# Altium PCB PCB.PcbDoc
Units mm, origin at the board's own origin, x right, y up, seen from the top; angles counter-clockwise.
Board outline 152.4 x 101.6 mm, 2 copper layers (Top Layer, Bottom Layer); 14 components, 24 nets, 96 pads, 0 vias.
Unrouted connection lines stored in the file: 43.
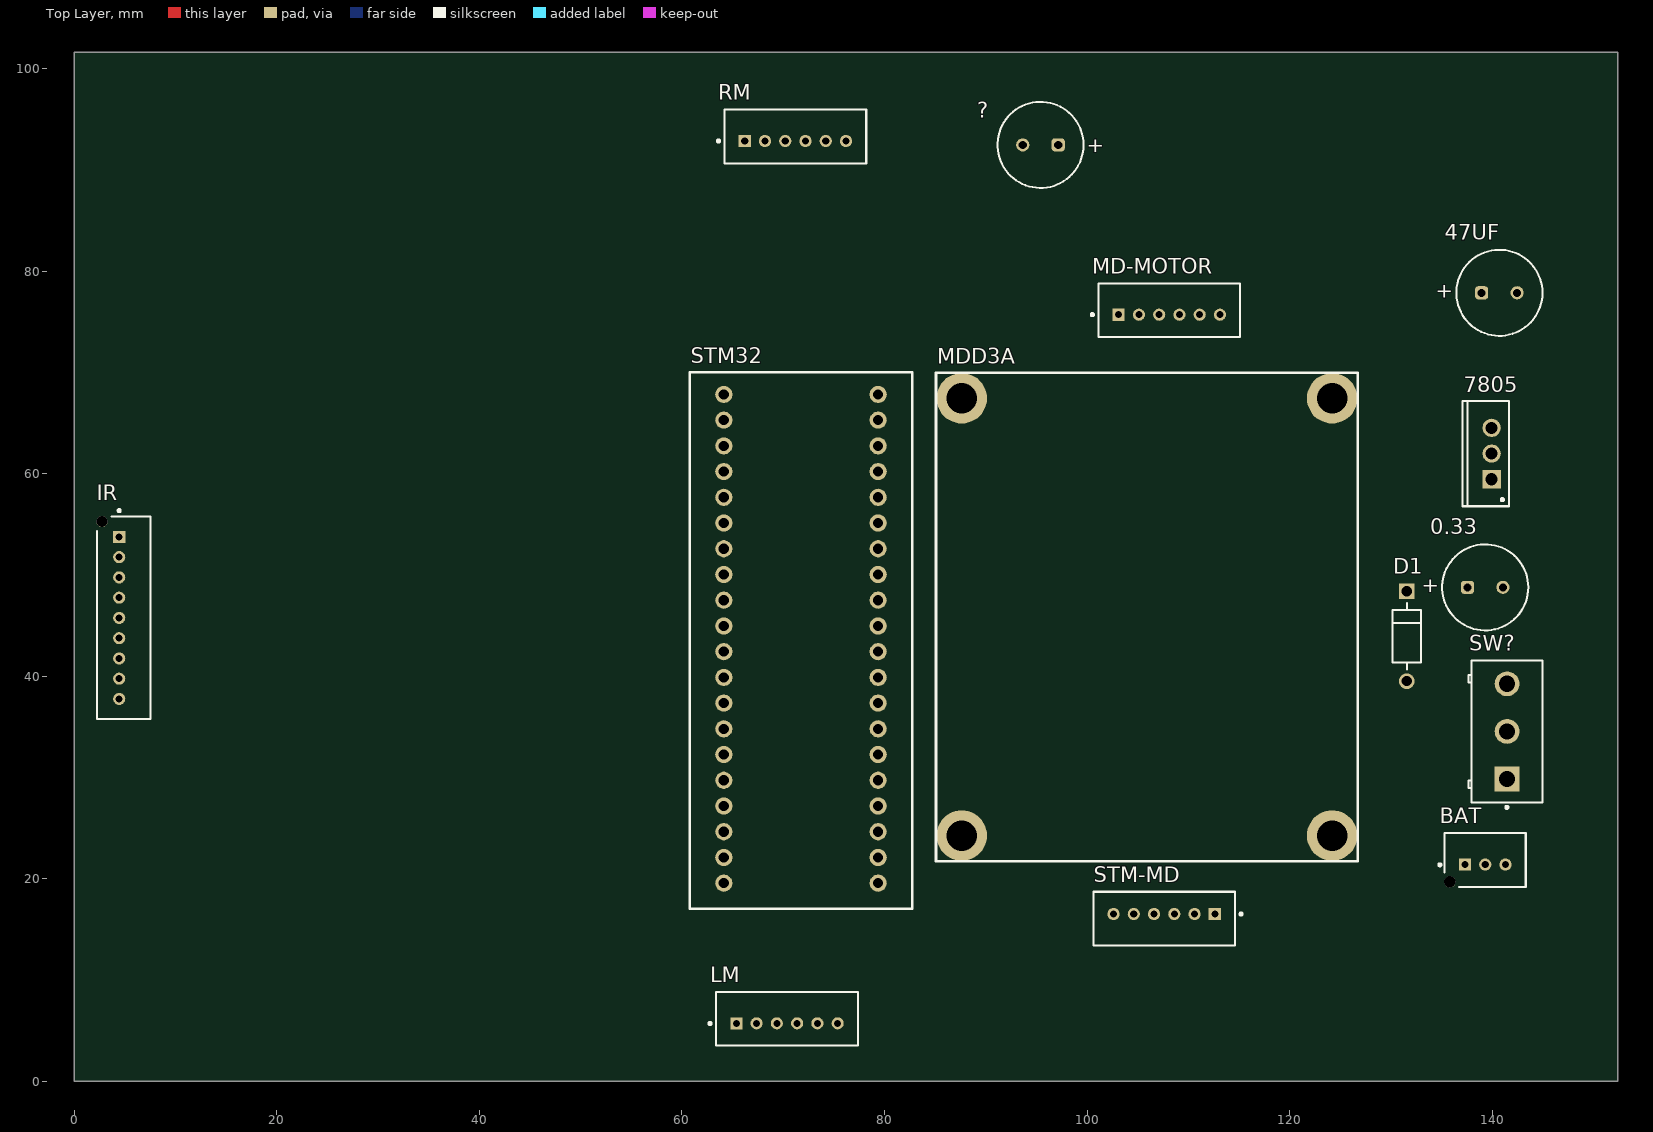
[diagram p0: Top Layer view]
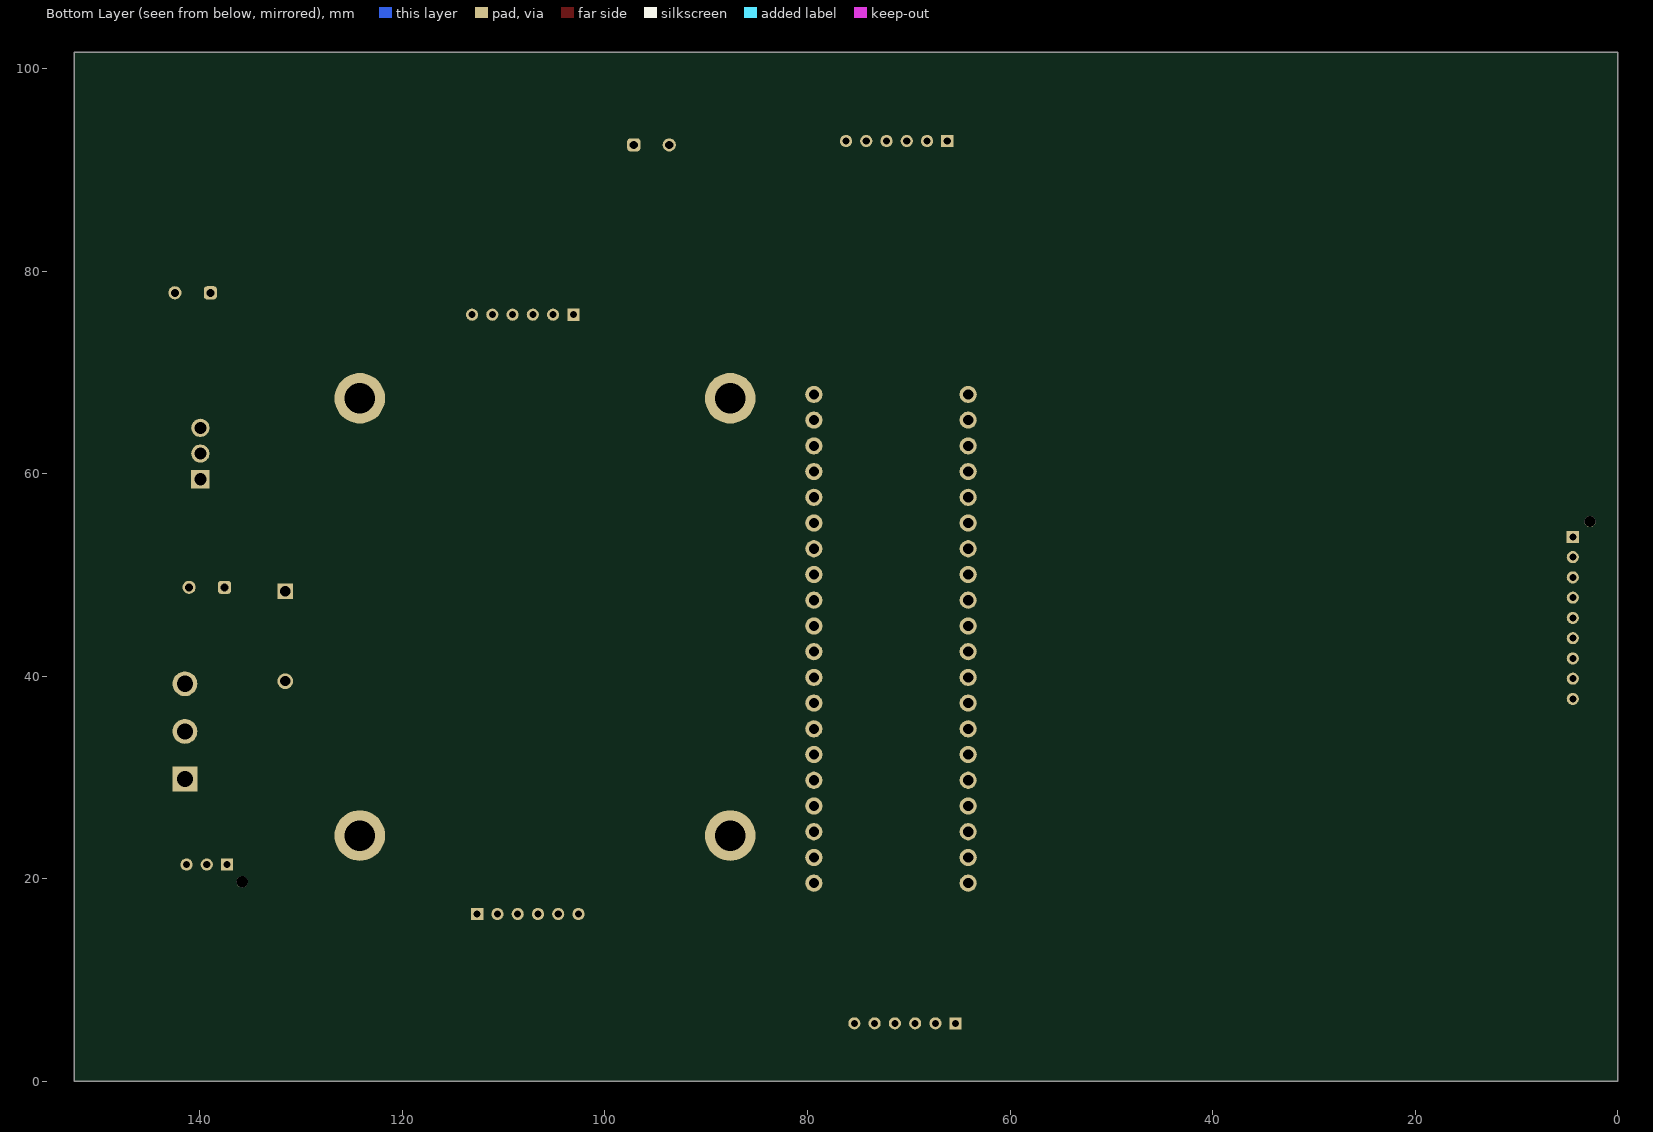
[diagram p1: Bottom Layer view, seen from below]

## Layer stack, top to bottom
Top Solder: solder mask 0.0102, Solder Resist, Dk 3.5
Top Layer: signal copper 0.0356
Dielectric 1: dielectric 0.32, FR-4, Dk 4.8
Bottom Layer: signal copper 0.0356
Bottom Solder: solder mask 0.0102, Solder Resist, Dk 3.5

## Board outline
0,0 152.4,0 152.4,101.6 0,101.6

## Design rules (kind name [scope] priority, off if disabled: settings)
Clearance [All] p1: gap=0.254 ignorepadtopadclearanceinfootprint=FALSE
PolygonConnect [All] p1: connectstyle=Relief reliefconductorwidth=0.254 reliefentries=4 polygonreliefangle="90 Angle" airgapwidth=0.254
RoutingVias [All] p1: holewidth=0.711 width=1.27 viastyle="Through Hole" minholewidth=0.711 minwidth=1.27 maxholewidth=0.711 maxwidth=1.27
SolderMaskExpansion [All] p1: expansion=0 istentingtop=FALSE
SupplyNets "Schematic Supply Nets_1" [InNet('+5')] p1: voltage=0.000
SupplyNets "Schematic Supply Nets" [InNet('GND')] p2: voltage=0.000
Width [All] p1: maxlimit=0.254 minlimit=0.254 preferedwidth=0.254
30 further rules are at their usual default settings.

## Components (designator, comment, footprint, x,y, rotation, side; value= is the part's Value field where it differs from the comment)
0.33 "860160274015" WCAP-ATLL_D8H11.5 139.319,48.768 r180 top
47UF "860160274015" WCAP-ATLL_D8H11.5 140.716,77.851 r180 top
7805 "L7805CP" TO220FP 139.954,61.976 r90 top
? "860160274015" WCAP-ATLL_D8H11.5 95.405,92.456 r0 top
BAT "B03B-PASK-1(LF)(SN)" FP-B03B-PASK-1_LF_SN-MFG 139.319,21.844 r180 top
D1 "1N4007" FP-1N4007-MFG 131.572,43.942 r270 top value=15pF
IR "B09B-PASK-1(LF)(SN)" FP-B09B-PASK-1_LF_SN-MFG 4.884,45.752 r90 top
LM "B06B-PASK(LF)(SN)" FP-B06B-PASK_LF_SN-MFG 70.374,6.165 r180 top
MD-MOTOR "B06B-PASK(LF)(SN)" FP-B06B-PASK_LF_SN-MFG 108.124,76.142 r180 top
MDD3A "MDD3A_MODULE" MDD3A_MODULE 126.75,21.717 r90 top (schematic designator *)
RM "B06B-PASK(LF)(SN)" FP-B06B-PASK_LF_SN-MFG 71.199,93.287 r180 top
STM32 "STM32_BLUEPILL" STM32_Bluepill 82.755,17.018 r90 top
STM-MD "B06B-PASK(LF)(SN)" FP-B06B-PASK_LF_SN-MFG 107.617,16.06 r0 top
SW? "CS12ANW03" FP-CS12ANW03-MFG 141.478,34.543 r90 top

## Footprints (in the part's own frame and the unit in brackets; to place one, negate y for a bottom-side part, rotate by r counter-clockwise, add the part's x,y. Pads: shape width x height; smd on the part's side, far side on the other; paste and mask are expansions set on the pad)
FP-1N4007-MFG [mm]
  rect 1.55x1.55 hole 1 paste-2539.97 mask+0: 1(-4.44,0)
  round 1.55 hole 1 paste-2539.97 mask+0: 2(4.44,0)
  silkscreen extent -3.26,-1.4 3.26,1.4, body extent -5.32,-1.5 5.32,1.5, height 0.25
FP-B03B-PASK-1_LF_SN-MFG [mm]
  rect 1.2x1.2 hole 0.7 paste-2539.97 mask+0: 1(2,0.45)
  round 1.2 hole 0.7 paste-2539.97 mask+0: 2(0,0.45) 3(-2,0.45)
  round 1.1 hole 1.1 unplated paste-2539.97 mask+0: ""(3.5,2.15)
  silkscreen extent -4,-2.65 4.6,2.65, body extent -4.1,-2.75 4.15,2.8, height 0.25
FP-B06B-PASK_LF_SN-MFG [mm]
  rect 1.2x1.2 hole 0.7 paste-2539.97 mask+0: 1(5,0.45)
  round 1.2 hole 0.7 paste-2539.97 mask+0: 2(3,0.45) 3(1,0.45) 4(-1,0.45) 5(-3,0.45) 6(-5,0.45)
  silkscreen extent -7,-2.65 7.72,2.65, body extent -7.1,-2.75 7.1,2.75, height 0.25
FP-B09B-PASK-1_LF_SN-MFG [mm]
  rect 1.2x1.2 hole 0.7 paste-2539.97 mask+0: 1(8,0.45)
  round 1.2 hole 0.7 paste-2539.97 mask+0: 2(6,0.45) 3(4,0.45) 4(2,0.45) 5(0,0.45) 6(-2,0.45) 7(-4,0.45) 8(-6,0.45) 9(-8,0.45)
  round 1.1 hole 1.1 unplated paste-2539.97 mask+0: ""(9.5,2.15)
  silkscreen extent -10,-2.65 10.72,2.65, body extent -10.1,-2.75 10.15,2.8, height 0.25
FP-CS12ANW03-MFG [mm]
  rect 2.45x2.45 hole 1.6 paste-2539.97 mask+0: 1(-4.7,0)
  round 2.45 hole 1.6 paste-2539.97 mask+0: 2(0,0) 3(4.7,0)
  silkscreen extent -7.62,-3.5 7,3.8, body extent -7.1,-3.6 7.1,3.91, height 0.25
MDD3A_MODULE [mm]
  round 5 hole 3: MH1(2.54,39.12) MH2(45.72,39.12) MH3(2.54,2.54) MH4(45.72,2.54)
  silkscreen extent 0,0 48.26,41.66
STM32_Bluepill [mm]
  round 1.7 hole 1: 1(2.54,18.62) 2(5.08,18.62) 3(7.62,18.62) 4(10.16,18.62) 5(12.7,18.62) 6(15.24,18.62) 7(17.78,18.62) 8(20.32,18.62) 9(22.86,18.62) 10(25.4,18.62) 11(27.94,18.62) 12(30.48,18.62) 13(33.02,18.62) 14(35.56,18.62) 15(38.1,18.62) 16(40.64,18.62) 17(43.18,18.62) 18(45.72,18.62) 19(48.26,18.62) 20(50.8,18.62) 21(2.54,3.38) 22(5.08,3.38) 23(7.62,3.38) 24(10.16,3.38) 25(12.7,3.38) 26(15.24,3.38) 27(17.78,3.38) 28(20.32,3.38) 29(22.86,3.38) 30(25.4,3.38) 31(27.94,3.38) 32(30.48,3.38) 33(33.02,3.38) 34(35.56,3.38) 35(38.1,3.38) 36(40.64,3.38) 37(43.18,3.38) 38(45.72,3.38) 39(48.26,3.38) 40(50.8,3.38)
  silkscreen extent 0,0 53,22
TO220FP [mm] "TO, Thru-Hole, Vertical, Heatsink Mounted; 3 In-Line Leads; Pitch 2.54 mm"
  rect 1.8x1.8 hole 1.2: 1(-2.54,0)
  round 1.8 hole 1.2: 2(0,0) 3(2.54,0)
  silkscreen extent -5.2,-1.7 5.2,2.9, body extent -5.25,-1.75 5.25,2.95, height 20
WCAP-ATLL_D8H11.5 [mm] "Aluminum Electrolytic Capacitors, 8x11.5mm"
  rrect50% 1.3x1.3 hole 0.8: 1(1.75,0)
  round 1.3 hole 0.8: 2(-1.75,0)
  silkscreen extent -4.25,-4.25 4.25,4.25, body extent -3.99,-4 4,4, height 11.81

## Part data
0.33 47UF ?: library part CMP-03913-54007388-2, "Aluminium Electrolytic Capacitor-Leaded Rohs Compliant: Yes", Capacitance=270µF, Case/Package=Radial, Leakage Current=27µA, Max Operating Temperature=105°C, Min Operating Temperature=-55°C, Ripple Current=420mA, Tolerance=20%, Voltage Rating=10V, Diameter=8mm, Height - Seated (Max)=13.0048mm, Impedance=530mΩ, Lead Pitch=3.5052mm, Length=11.5mm, Life (Hours)=7000hours, Mount="Through Hole", Packaging="Tape & Box (TB)", Pitch=3.5mm, Polarity=Polar, RoHS=Compliant
7805: library part CMP-0244-00474-1, "Positive Voltage Regulator, 5V, 3-Pin TO-220FP", ComponentLink1Description="Manufacturer URL", ComponentLink1URL=http://www.st.com, ComponentLink2Description=Datasheet, ComponentLink2URL=http://www.st.com/internet/com/TECHNICAL_RESOURCES/TECHNICAL_LITERATURE/DATASHEET/CD00000444.pdf, DatasheetVersion=16/11/2011, PackageDescription="TO, Thru-Hole, Vertical, Heatsink Mounted; 3 In-Line Leads; Pitch 2.54 mm", PackageReference=TO220FP, PackageVersion=2011
BAT: library part CMP-17439-000193-1, "CONN HEADER VERT 3POS 2MM", Color=Natural, Current Rating=3A, Flammability Rating="UL94 V-0", Housing Color=White, Voltage Rating=250V, Connector Type=Header, Contact Finish - Mating=TIN, Contact Material="Copper Alloy", Contact Mating Length=0.126inch, Contact Plating=Tin, Contact Shape=Square, Contact Type="Male Pin", Fastening Type=Ramp, Insulation Color=Natural, Insulation Material=PBT, Lead Free="Lead Free", Mated Stacking Heights=14.9mm, Mount="Through Hole", Number of Contacts=3, Number of Positions=3, Number of Rows=1, Orientation=Straight, Packaging=Bulk, Pitch=2mm, Series=PA, Termination=Solder
D1: library part CMP-123542-000001-1, "Rectifier diode 1000 V 1 A DO-41, ,", Capacitance=15pF, Forward Current=1A, Manufacturer=Diotec, Max Junction Temp=+175°C, Max Repetitive Reverse Voltage=1000V, Max Surge Forward Current=27A, Peak Reverse Current=5uA, Temperature="-50°C to +175°C", Temperature Range Low=-50°C, Automotive=No, Category=Diode, ComponentLink2Description=Datasheet, ComponentLink2URL=https://datasheet.octopart.com/1N4007-Diotec-datasheet-62346875.pdf, Device Class L1="Discrete Semiconductors", Device Class L2=Diodes, Device Class L3="Rectifier Diodes", Height=2.8mm, Ipc Land Pattern Name=DIOAD888W100L520D280, Lead Free=Yes, Manufacturer Part Number=1N4007, Octopart=https://octopart.com/1n4007-diotec-4040411, Package=1N4007, Reverse Voltage=1000V, RoHS=TRUE, Temperature Range High=+175°C
IR: library part CMP-17439-000536-1, "CONN HEADER VERT 9POS 2MM", Color=Natural, Current Rating=3A, Flammability Rating="UL94 V-0", Housing Color=White, Voltage Rating=250V, Connector Type=Header, Contact Finish - Mating=TIN, Contact Material="Copper Alloy", Contact Mating Length=0.126inch, Contact Plating=Tin, Contact Shape=Square, Contact Type="Male Pin", Fastening Type=Ramp, Insulation Color=Natural, Insulation Material=PBT, Lead Free="Lead Free", Mated Stacking Heights=14.9mm, Mount="Through Hole", Number of Contacts=9, Number of Positions=9, Number of Rows=1, Orientation=Straight, Packaging=Bulk, Pitch=2mm, Series=PA, Termination=Solder
LM MD-MOTOR RM STM-MD: library part CMP-17439-000140-1, "CONN HEADER VERT 6POS 2MM", Color=Natural, Housing Color=White, Connector Type="Male Pin", Contact Material="Copper Alloy", Contact Mating Length=0.126inch, Contact Plating=Tin, Contact Type="Male Pin", Fastening Type=Ramp, Lead Free="Lead Free", Mount="Through Hole", Number of Contacts=6, Number of Positions=6, Number of Rows=1, Packaging=Bulk, Pitch=0.079inch, Series=PA, Termination="Kinked Pin"
SW?: library part CMP-31746-000002-1, "SWITCH SLIDE SPDT 3A 125V", Contact Current Rating=3A, Flammability Rating="UL94 V-0", Max Operating Temperature=85°C, Max Voltage Rating (AC)=250V, Min Operating Temperature=-30°C, Package Quantity=1, Voltage Rating (AC)=125V, Actuator Length=5.1mm, Actuator Material=Nylon, Actuator Type=Standard, Contact Material=Copper, Contact Plating=Silver, Contact Style=Non-Shorting, Current Rating=3A, Depth=7.5mm, Electrical Life=20000Cycles, Illumination Type=Non-Illuminated, Lead Free="Lead Free", Length=14mm, Max Current Rating=3A, Mechanical Life=50000Cycles, Mount="Through Hole", Orientation=Vertical, Packaging=Tray, Primary Type=SWITCH, Reach SVHC Compliant=Yes, RoHS Compliant=Yes, Series=CS, Switch Function=On-On, Switch Travel=2.2mm, Termination="PC Pin", Throw Configuration=SPDT

## Nets (pads, with @x,y where several pads share a name; then routed paths per layer and width w, separated by ;. In a path a pad name is that pad's centre, name@x,y a point inside that pad or via, vN(x,y) a via of type N, cw(c..) or ccw(c..) an arc to the next point about the centre after c; other vN are vias at no path point)
+5: 47UF.1 7805.3 ?.1 IR.1 LM.4 RM.4 STM32.38 STM-MD.3
EM1A: LM.2 STM32.16
EM1B: LM.1 STM32.15
EM2A: RM.2 STM32.35
EM2B: RM.1 STM32.34
GND: 0.33.2 47UF.2 7805.2 ?.2 BAT.3 IR.2 LM.3 MD-MOTOR.4 RM.3 STM32.1 STM32.2 STM32.39 STM-MD.4
INM1A: STM32.28 STM-MD.1
INM1B: STM32.27 STM-MD.2
INM2A: STM32.26 STM-MD.5
INM2B: STM32.25 STM-MD.6
M1A: LM.5 MD-MOTOR.1
M1B: LM.6 MD-MOTOR.2
M2A: MD-MOTOR.5 RM.5
M2B: MD-MOTOR.6 RM.6
NetBAT_1: BAT.1 SW?.2
NetD1_2: D1.2 SW?.3 | length 0.4
  Top Layer w0.254: D1.2 D1.2@131.82,39.254
NetIR_3: IR.3 STM32.12
NetIR_4: IR.4 STM32.11
NetIR_5: IR.5 STM32.10
NetIR_6: IR.6 STM32.9
NetIR_7: IR.7 STM32.8
NetIR_8: IR.8 STM32.7
NetIR_9: IR.9 STM32.6
VBAT: 0.33.1 7805.1 D1.1 MD-MOTOR.3
pads on no net: BAT. BAT.2 IR. MDD3A.MH1 MDD3A.MH2 MDD3A.MH3 MDD3A.MH4 STM32.3 STM32.4 STM32.5 STM32.13 STM32.14 STM32.17 STM32.18 STM32.19 STM32.20 STM32.21 STM32.22 STM32.23 STM32.24 STM32.29 STM32.30 STM32.31 STM32.32 STM32.33 STM32.36 STM32.37 STM32.40 SW?.1

## Text inside footprints (layer, text, board x,y; h text height)
0.33: Top Overlay "+" at 134.769,49.518 h1.5 r180
47UF: Top Overlay "+" at 136.166,78.601 h1.5 r180
?: Top Overlay "+" at 99.955,91.706 h1.5